# Altium PCB CarteMere.PcbDoc
Units mm, origin at the board's own origin, x right, y up, seen from the top; angles counter-clockwise.
Board outline 100 x 100 mm, 2 copper layers (Top Layer, Bottom Layer), stack 1.534 mm thick; 20 components, 29 nets, 125 pads, 42 vias.
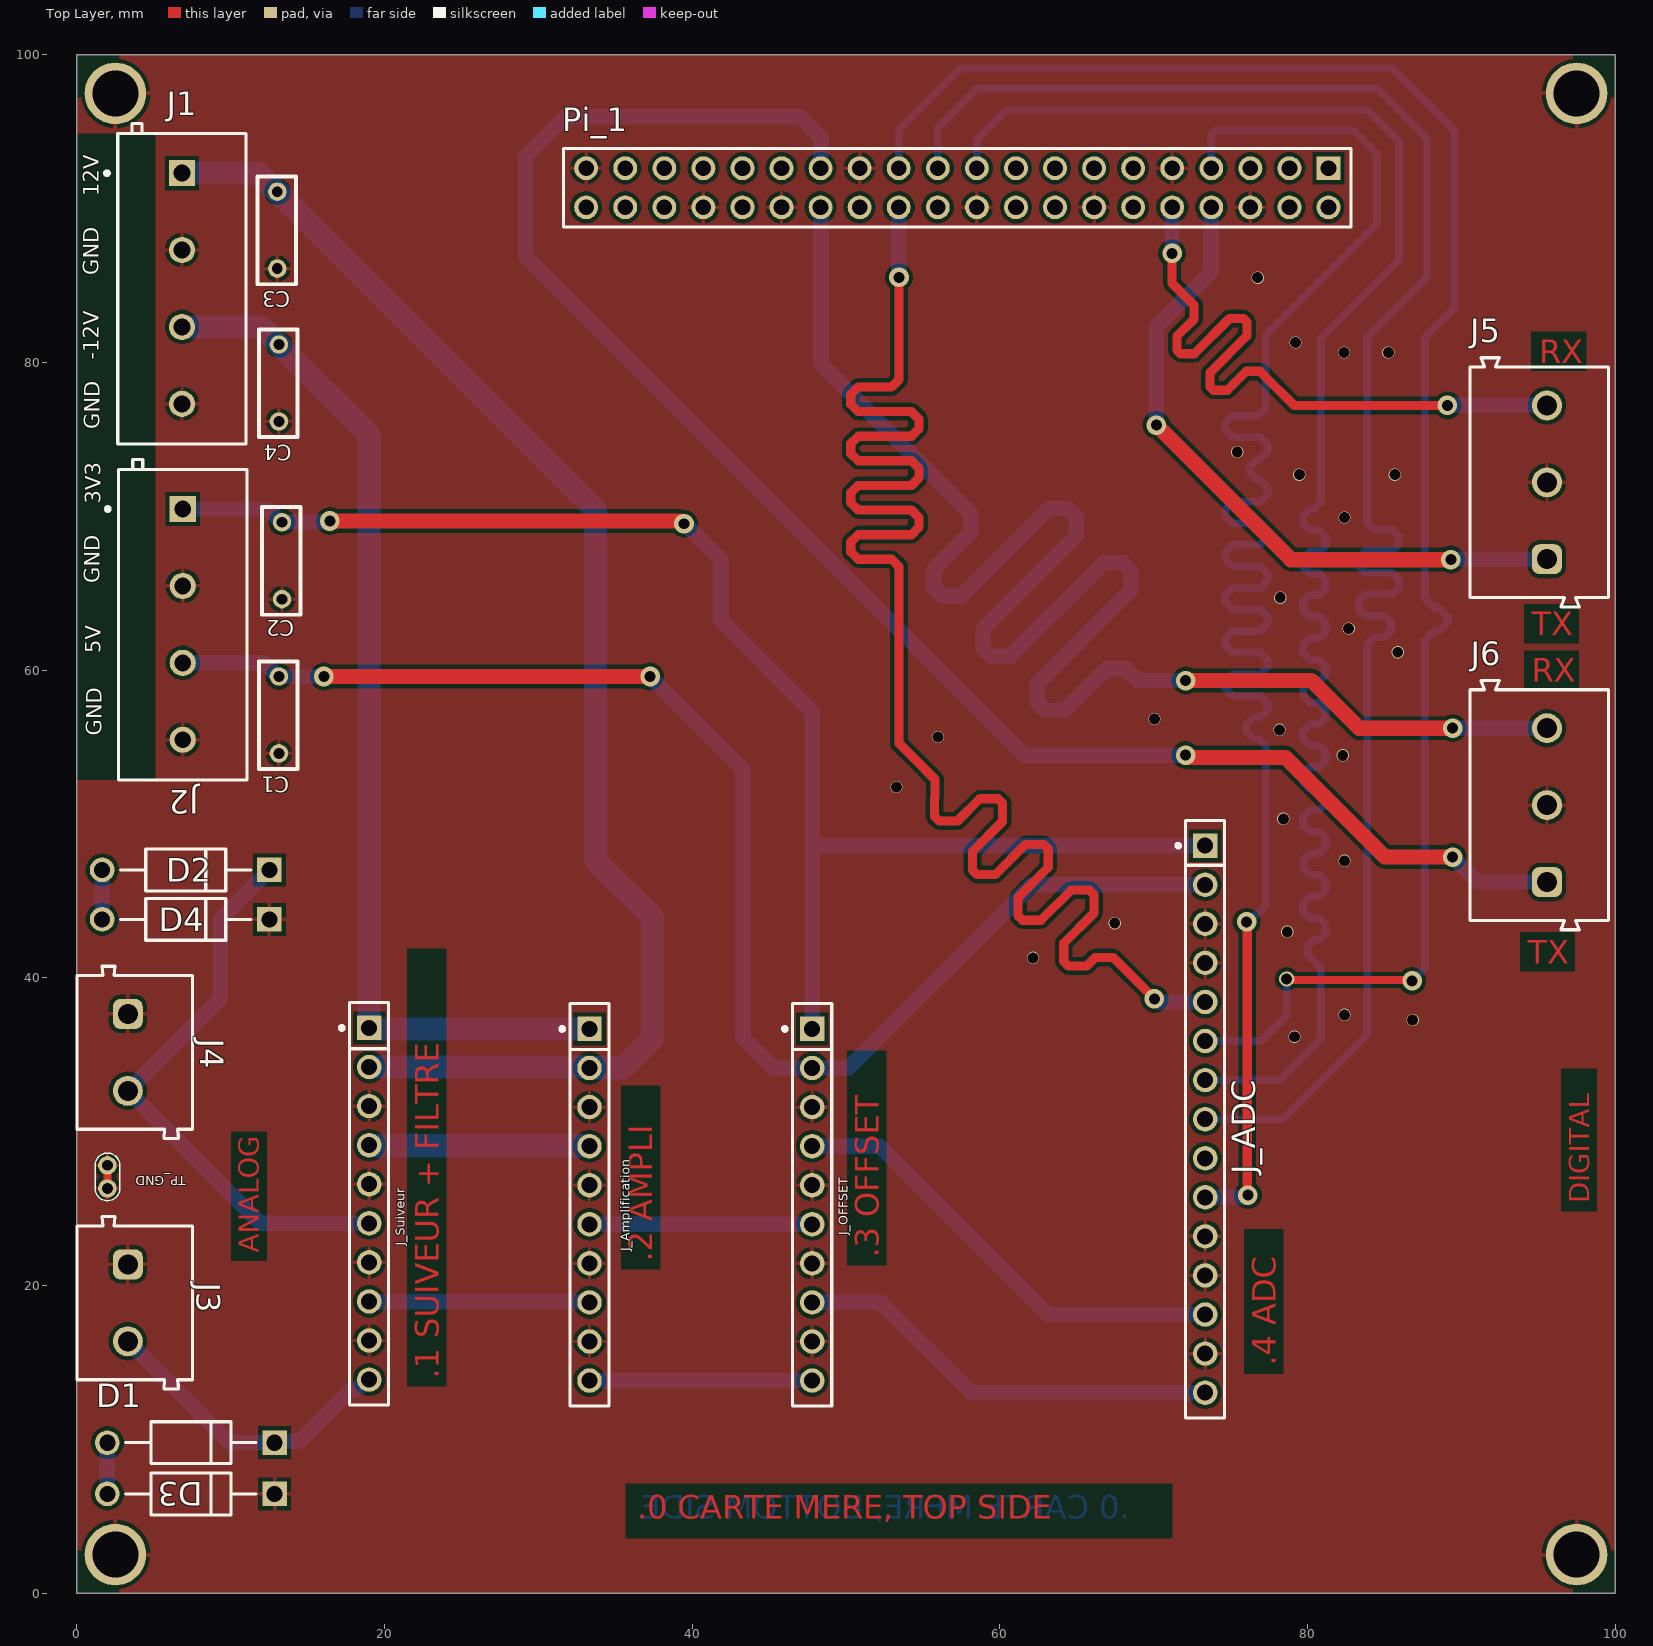
[diagram p0: Top Layer view]
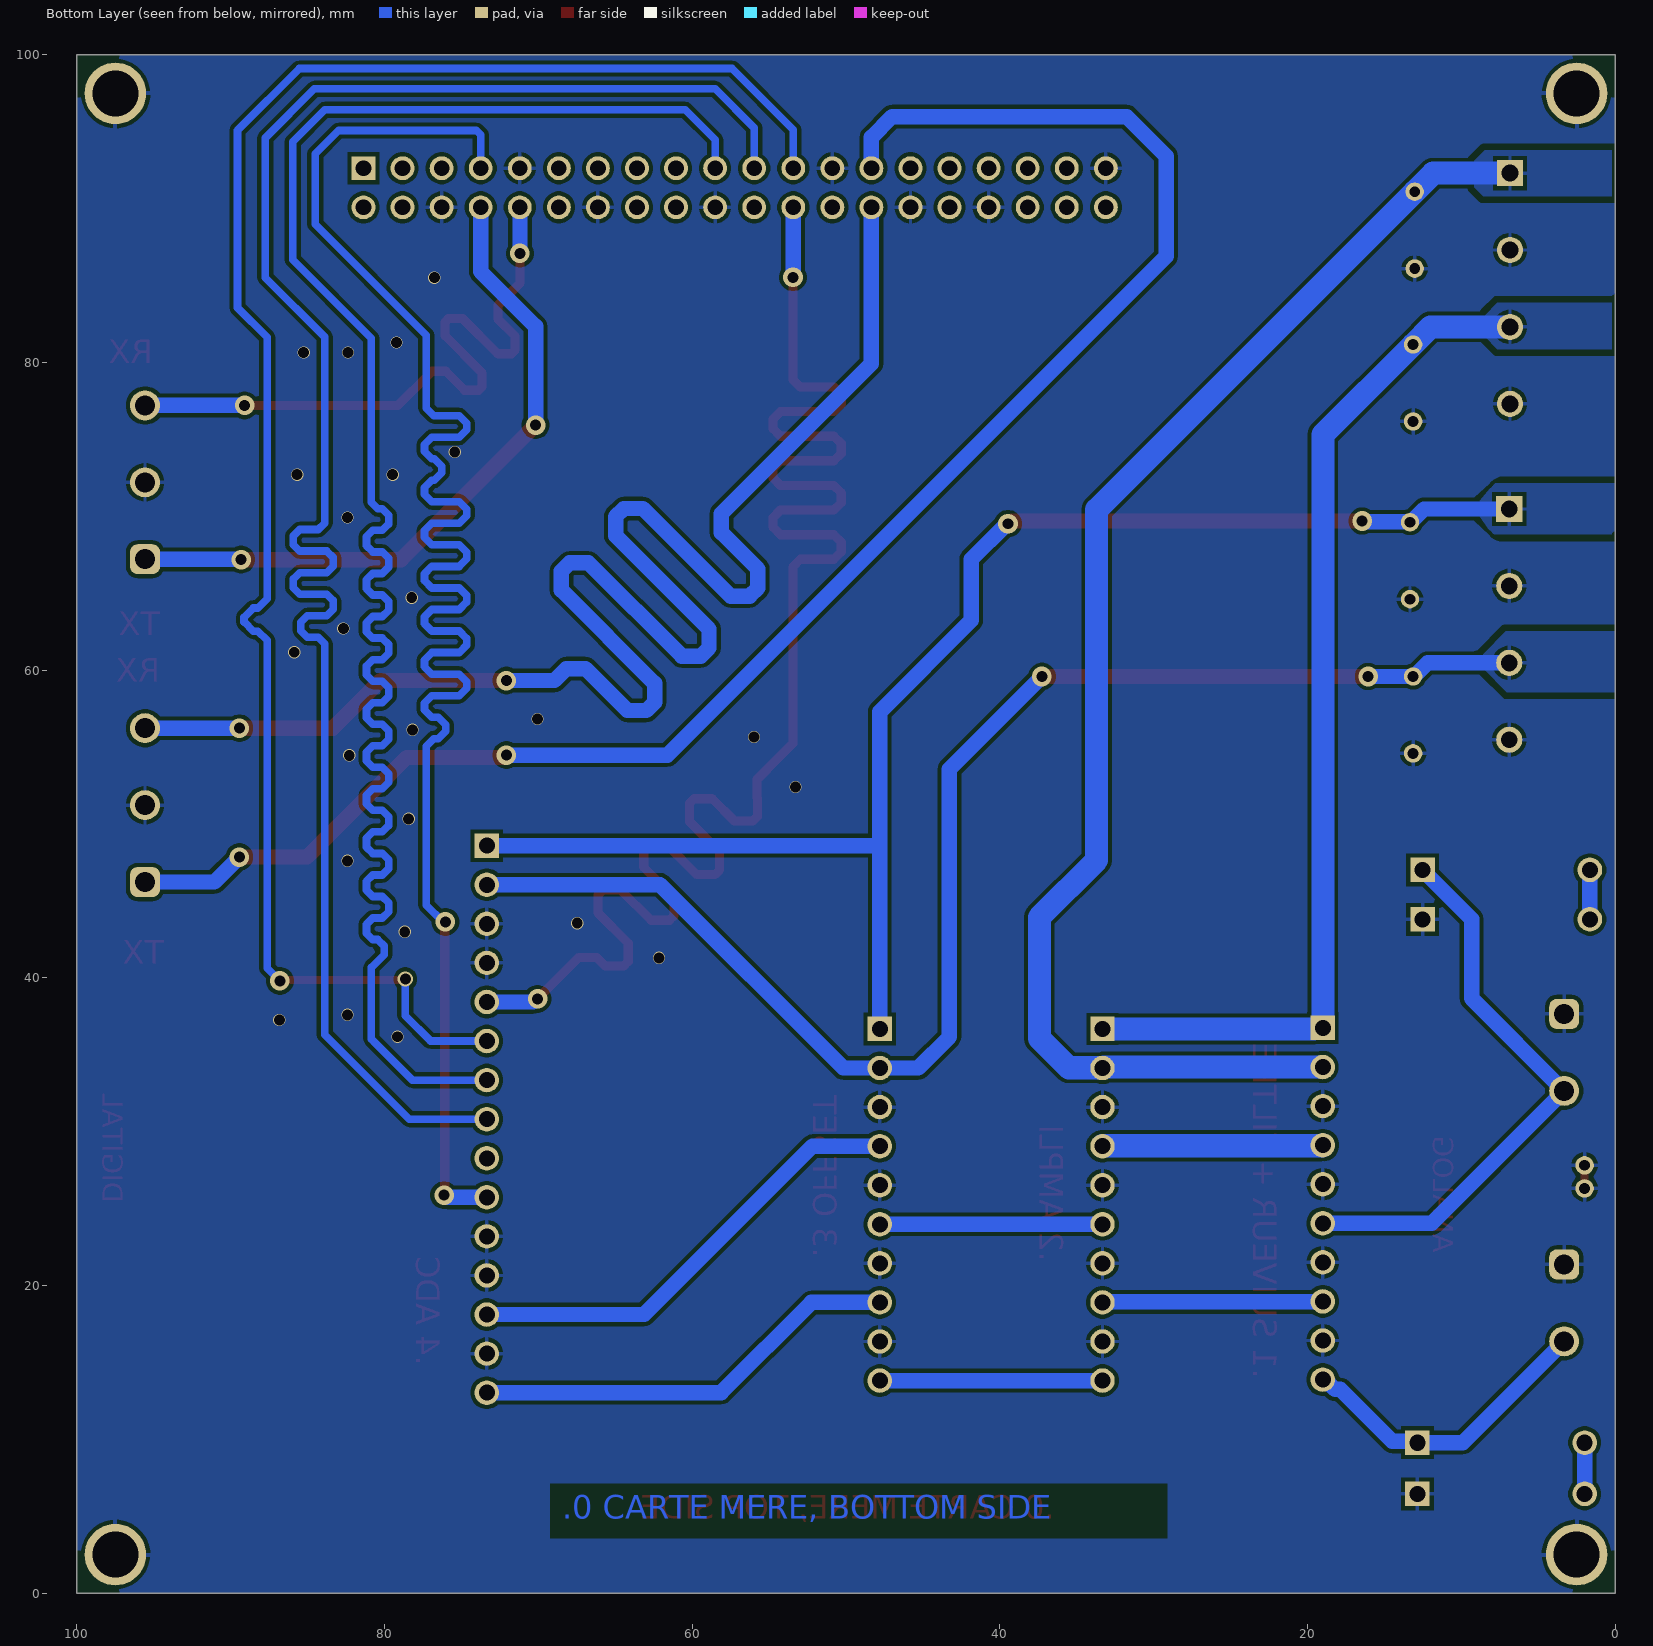
[diagram p1: Bottom Layer view, seen from below]
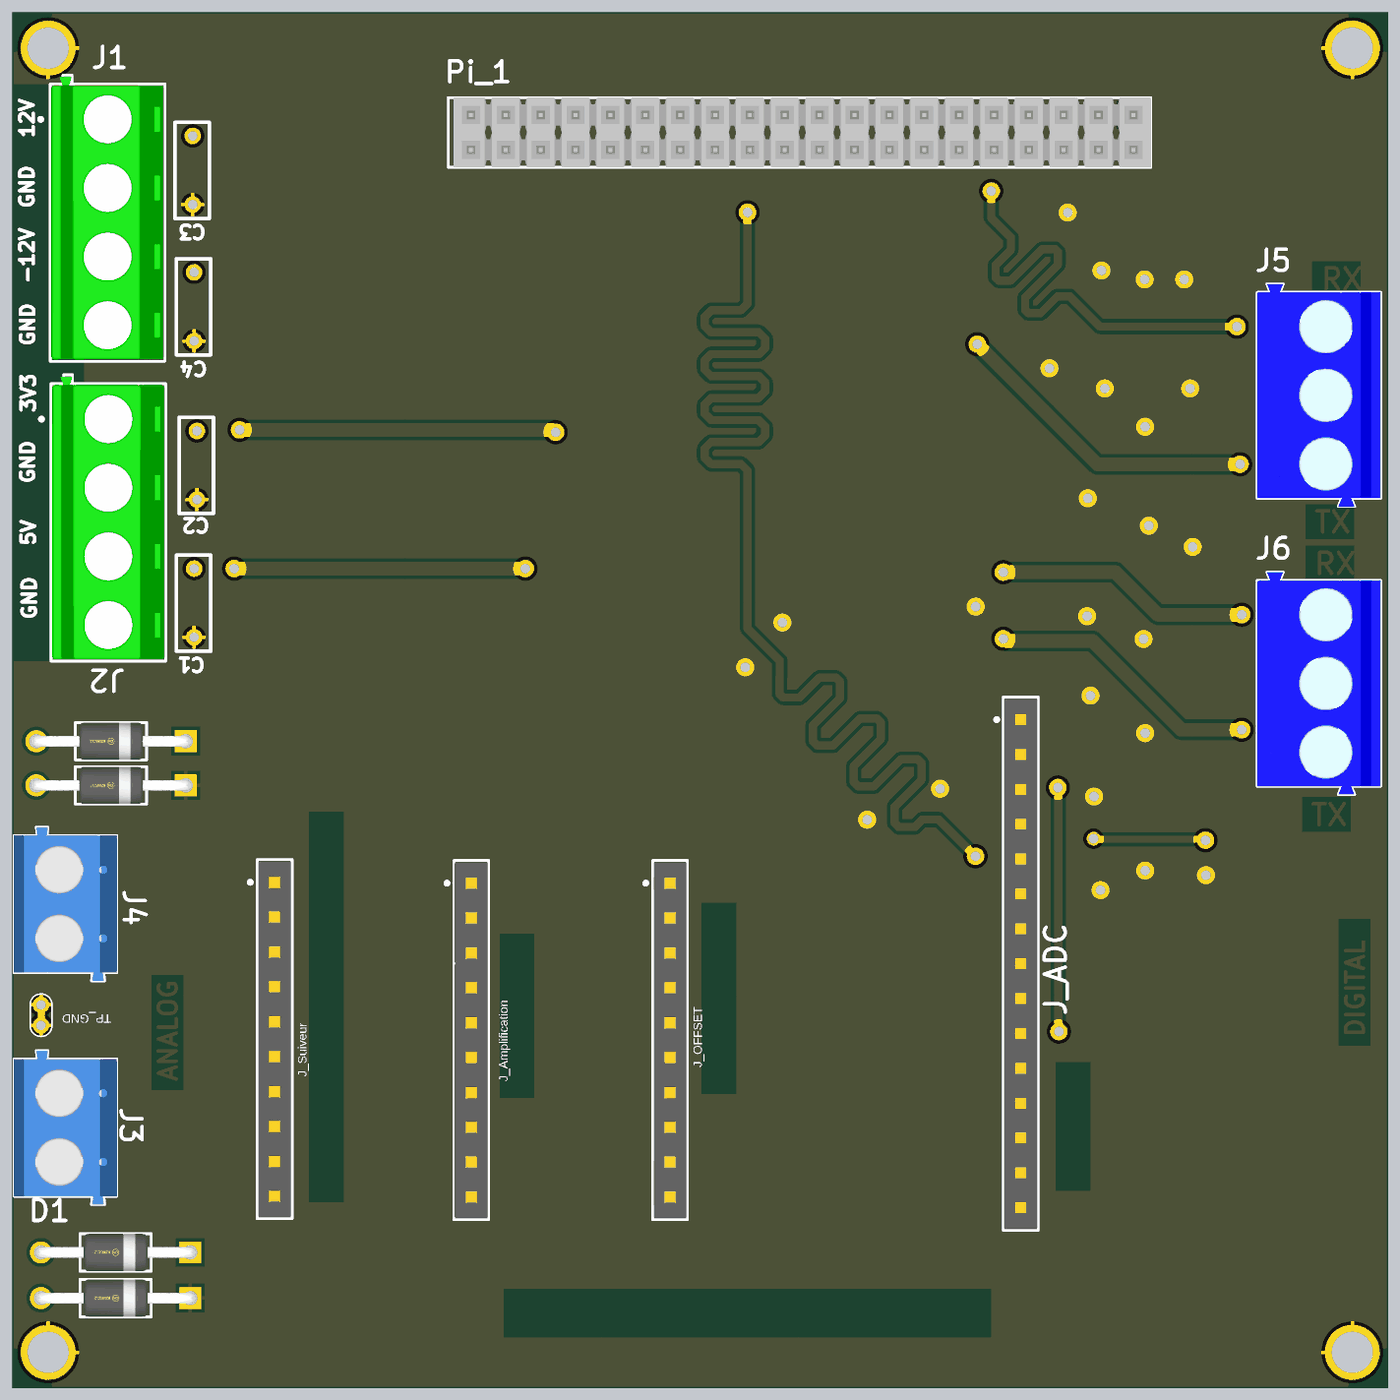
[diagram p2: 3D render of the assembled board from above, using the file's embedded part models]

## Layer stack, top to bottom
Top Solder: solder mask 0.0127, Solder Resist, Dk 3.3
Top Layer: signal copper 0.0178
Dielectric1: core 1.4986, FR-4, Dk 4.3
Bottom Layer: signal copper 0.0178
Bottom Solder: solder mask 0.0127, Solder Resist, Dk 3.3

## Board outline
0,0 0,100 100,100 100,0

## Design rules (kind name [scope] priority, off if disabled: settings)
Clearance [All] p1: gap=0.254 ignorepadtopadclearanceinfootprint=FALSE
DiffPairsRouting [All] p1: maxlimit=0.254 minlimit=0.254 mostfreqgap=0.254 toplayer_minwidth=0.254 toplayer_maxwidth=0.254 toplayer_prefwidth=0.254 bottomlayer_minwidth=0.254 bottomlayer_maxwidth=0.254 bottomlayer_prefwidth=0.254 maxuncoupledlength=12.7
HoleSize [All] p1: absolutevalues=TRUE maxlimit=7.62 minlimit=0.15 maxpercent=80.000 minpercent=20.000
MinimumAnnularRing [All] p1: minimumring=0.1
PasteMaskExpansion [All] p1: expansion=0.254
PlaneClearance [All] p1: clearance=0.381
PlaneConnect [All] p1: pad.planeconnectstyle=Relief pad.reliefexpansion=0.508 pad.reliefentries=4 pad.reliefconductorwidth=0.254 pad.reliefairgap=0.254 via.planeconnectstyle=Direct via.reliefexpansion=0.508 via.reliefentries=4 via.reliefconductorwidth=0.254 via.reliefairgap=0.254
PolygonConnect [All] p1: thpad.connectstyle=Relief thpad.reliefconductorwidth=0.254 thpad.reliefentries=4 thpad.polygonreliefangle="90 Angle" thpad.airgapwidth=0.254 smdpad.connectstyle=Relief smdpad.reliefconductorwidth=0.254 smdpad.reliefentries=4 smdpad.polygonreliefangle="90 Angle" smdpad.airgapwidth=0.254 via.connectstyle=Direct via.reliefconductorwidth=0.254 via.reliefentries=4 via.polygonreliefangle="90 Angle" via.airgapwidth=0.254
RoutingVias [All] p1: holewidth=0.254 width=0.254 viastyle="Through Hole" minholewidth=0.254 minwidth=0.254 maxholewidth=1 maxwidth=1.5
SMDNeckDown [All] p1: percent=100.000
SilkToSilkClearance [All] p1 off: silktosilkclearance=0.254
SilkToSolderMaskClearance SilkscreenOverComponentPads [IsPad] p1: minsilkscreentomaskgap=0.254 clearancetoexposedcopper=TRUE
SolderMaskExpansion [All] p1: expansion=0.254 istentingtop=FALSE
SupplyNets "Schematic Supply Nets_3" [InNet('-12V')] p1: voltage=0.000
SupplyNets "Schematic Supply Nets_2" [InNet('12V')] p2: voltage=0.000
SupplyNets "Schematic Supply Nets_4" [InNet('GND')] p3: voltage=0.000
SupplyNets "Schematic Supply Nets_1" [InNet('5V')] p4: voltage=0.000
SupplyNets "Schematic Supply Nets" [InNet('3V3')] p5: voltage=0.000
Width [All] p1: maxlimit=2 minlimit=0.254 preferedwidth=0.254 minimp=50.000000 maximp=50.000000 favimp=50.000000
23 further rules are at their usual default settings.

## Classes and differential pairs
component class Sheet1: C1 C2 C3 C4

## Components (designator, comment, footprint, x,y, rotation, side; value= is the part's Value field where it differs from the comment)
C1 "Cap_6.0*2.5*6mm" Cap_6.0%2A2.5%2A6mm 13.132,54.59 r90 top value=100nF
C2 "Cap_6.0*2.5*6mm" Cap_6.0%2A2.5%2A6mm 13.335,64.618 r90 top value=100nF
C3 "Cap_6.0*2.5*6mm" Cap_6.0%2A2.5%2A6mm 13.03,86.106 r90 top value=100nF
C4 "Cap_6.0*2.5*6mm" Cap_6.0%2A2.5%2A6mm 13.132,76.171 r90 top value=100nF
D1 "ZENER_Diode" Zener_Diode 7.417,9.779 r180 top value=2V
D2 "ZENER_Diode" Zener_Diode 7.078,47.016 r180 top value=2V
D3 "ZENER_Diode" Zener_Diode 7.417,6.452 r180 top value=2V
D4 "ZENER_Diode" Zener_Diode 7.078,43.801 r180 top value=2V
J1 "282836-4" FP-282836-4-MFG 6.833,85.115 r270 top
J2 "282836-4" FP-282836-4-MFG 6.884,63.277 r270 top
J3 "691102710002" 691102710002 3.759,18.872 r270 top
J4 "691102710002" 691102710002 3.759,35.154 r270 top
J5 "691101710003" 691101710003 95.071,72.212 r90 top
J6 "691101710003" 691101710003 95.071,51.227 r90 top
J_ADC "SSW-115-01-T-S" FP-SSW-115-01-T-S-MFG 73.348,30.81 r270 top
J_Amplification "SSW-110-01-G-S" FP-SSW-110-01-G-S-MFG 33.325,25.248 r270 top
J_OFFSET "SSW-110-01-G-S" FP-SSW-110-01-G-S-MFG 47.803,25.248 r270 top
J_Suiveur "SSW-110-01-G-S" FP-SSW-110-01-G-S-MFG 18.999,25.311 r270 top
Pi_1 "GPIO_conn_RaspberyPi" Pi_20x2_pins_Male 82.939,94.073 r180 top
TP_GND "Test_Point" Test_Point_Hook 1.983,27.808 r180 top

## Footprints (in the part's own frame and the unit in brackets; to place one, negate y for a bottom-side part, rotate by r counter-clockwise, add the part's x,y. Pads: shape width x height; smd on the part's side, far side on the other; paste and mask are expansions set on the pad)
691101710003 [mm] "5,00mm - modular - blue - Horizontal entry with pressure clamp - 12,6mm height - 03p"
  rrect50% 1.95x1.95 hole 1.3: 1(-5,-0.5)
  round 1.95 hole 1.3: 2(0,-0.5) 3(5,-0.5)
  silkscreen extent -8.1,-4.5 8.1,4.5, body extent -8.1,-4.5 8.1,4.5, height 12.65
691102710002 [mm] "5,00mm - modular - blue - Horizontal entry with pressure clamp - 9,9 mm height - 02p"
  rrect50% 1.95x1.95 hole 1.3: 1(-2.5,-0.45)
  round 1.95 hole 1.3: 2(2.5,-0.45)
  silkscreen extent -5.6,-3.75 5.6,3.75, body extent -5.6,-3.75 5.6,3.75, height 9.96
Cap_6.0%2A2.5%2A6mm [mm]
  round 1.2 hole 0.7: 1(0,0) 2(5,0)
  silkscreen extent -1.02,-1.21 5.98,1.29, body extent -1.02,-1.21 5.98,1.29, height 6
FP-282836-4-MFG [mm]
  rect 1.7x1.7 hole 1.1 paste-2539.97 mask+0: 1(-7.2,0)
  round 1.7 hole 1.1 paste-2539.97 mask+0: 2(-2.2,0) 3(2.8,0) 4(7.8,0)
  silkscreen extent -10.43,-5 10.43,4.18, body extent -10.52,-4.28 10.53,4.28, height 0.25
FP-SSW-110-01-G-S-MFG [mm]
  rect 1.59x1.59 hole 1.04 paste-2539.97 mask+0: 1(-11.43,0)
  round 1.59 hole 1.04 paste-2539.97 mask+0: 2(-8.89,0) 3(-6.35,0) 4(-3.81,0) 5(-1.27,0) 6(1.27,0) 7(3.81,0) 8(6.35,0) 9(8.89,0) 10(11.43,0)
  silkscreen extent -13.08,-1.9 13.08,1.27, body extent -13.18,-1.37 13.18,1.37, height 0.25
FP-SSW-115-01-T-S-MFG [mm]
  rect 1.59x1.59 hole 1.04 paste-2539.97 mask+0: 1(-17.78,0)
  round 1.59 hole 1.04 paste-2539.97 mask+0: 2(-15.24,0) 3(-12.7,0) 4(-10.16,0) 5(-7.62,0) 6(-5.08,0) 7(-2.54,0) 8(0,0) 9(2.54,0) 10(5.08,0) 11(7.62,0) 12(10.16,0) 13(12.7,0) 14(15.24,0) 15(17.78,0)
  silkscreen extent -19.43,-1.87 19.43,1.27, body extent -19.53,-1.37 19.53,1.37, height 0.25
Pi_20x2_pins_Male [mm] ".025 SQ Post Terminal Strip Assembly, 2x20 Pins, Vertical, 2.54mm Pitch, Male"
  rect 1.55x1.55 hole 1.02: 1(1.571,1.442)
  round 1.55 hole 1.02: 2(1.571,3.982) 3(4.111,1.442) 4(4.111,3.982) 5(6.651,1.442) 6(6.651,3.982) 7(9.191,1.442) 8(9.191,3.982) 9(11.731,1.442) 10(11.731,3.982) 11(14.271,1.442) 12(14.271,3.982) 13(16.811,1.442) 14(16.811,3.982) 15(19.351,1.442) 16(19.351,3.982) 17(21.891,1.442) 18(21.891,3.982) 19(24.431,1.442) 20(24.431,3.982) 21(26.971,1.442) 22(26.971,3.982) 23(29.511,1.442) 24(29.511,3.982) 25(32.051,1.442) 26(32.051,3.982) 27(34.591,1.442) 28(34.591,3.982) 29(37.131,1.442) 30(37.131,3.982) 31(39.671,1.442) 32(39.671,3.982) 33(42.211,1.442) 34(42.211,3.982) 35(44.751,1.442) 36(44.751,3.982) 37(47.291,1.442) 38(47.291,3.982) 39(49.831,1.442) 40(49.831,3.982)
  silkscreen extent 0.11,0.17 51.29,5.25, body extent 0.11,0.17 50.91,5.25, height 9.27
Test_Point_Hook [mm]
  round 1.2 hole 0.7: TP?(0,1.5) TP?(0,0)
  Top Layer lines w0.5: -0.004,1.004 -0.004,0.555
  silkscreen extent -0.8,-0.8 0.8,2.3
Zener_Diode [mm]
  rect 1.6x1.6 hole 1.05 paste-2539.97 mask+0: 1(-5.438,0)
  round 1.6 hole 1.05 paste-2539.97 mask+0: 2(5.438,0)
  silkscreen extent -4.24,-1.36 4.24,1.36, body extent -6.34,-1.46 6.34,1.46, height 0.25

## Part data
J1 J2: library part CMP-03790-46505329-1, "282836-4 Connector, Terminal Block; Wire Receptacle; 4 Pos.; 16-30 AWG; 0.197 in. CL; Sid", Color=Green, Current=13.5A, Flammability Rating="UL94 V-0", Manufacturer Lifecycle Status=ACTIVE, Max Supply Voltage (AC)=300V, Voltage Rating (AC)=250V, Approvals=UL, Connector System=Wire-to-Board, Connector Type=Receptacle, Contact Material=Brass, Contact Plating=Tin, Current Rating=13.5A, Depth=8.2mm, ELV=Compliant, Housing Color=Green, Housing Material=Polyamide, Lead Free="Lead Free", Lead Pitch=5mm, Length=20mm, Lifecycle Status=Production, Max Current Rating=13.5A, Max Voltage Rating (AC)=300V, Mount="Through Hole", NexarPartId=46505329, Number of Circuits=4, Number of Contacts=4, Number of Levels=1, Number of Poles=4, Number of Positions=4, Number of Positions Per Level=4, Number of Rows=1, Operating Supply Voltage=300V, Orientation=Straight, Packaging=Bulk, Pitch=5mm, Plating=Brass, Radiation Hardening=No, REACH SVHC=Unknown, RoHS=Compliant, Tail Length=3.5mm, Termination="Screw, Solder", Thread Size=M3, Voltage=300V, Voltage Rating=300V, Voltage Rating (DC)=250V, Width=10mm, Wire Gauge (Max)=30AWG, Wire Gauge (Min)=30AWG
J3 J4: library part CMP-1502-03258-2, Color=Blue, Current=15A, Max Operating Temperature=105°C, Min Operating Temperature=-40°C, Voltage=300V, Contact Material=Brass, Contact Plating=Tin, Current Rating=15A, Height=13.4mm, Housing Material=Nylon, Lead Pitch=5mm, Length=7.5mm, Mount="Through Hole", NexarPartId=8917706, Number of Contacts=2, Number of Levels=1, Number of Pins=2, Number of Positions Per Level=2, Packaging=Box, Pitch=5.0038mm, Plating=Steel, REACH SVHC=Unknown, RoHS=Compliant, Stripping Length=-6mm, Termination=Screw, Voltage Rating=300V, Width=11.2mm, Wire Gauge (Max)=22AWG, Wire Gauge (Min)=14AWG, Wire/Cable Gauge=22AWG
J5 J6: library part CMP-1502-03257-2, Color=Blue, Current=16A, Max Operating Temperature=105°C, Min Operating Temperature=-40°C, Voltage=250V, Contact Material=Brass, Contact Plating=Tin, Current Rating=16A, Height=16.4mm, Housing Material=Nylon, Lead Pitch=5mm, Length=9mm, Mount="Through Hole", NexarPartId=8917705, Number of Contacts=3, Number of Levels=1, Number of Pins=3, Number of Positions Per Level=3, Packaging=Box, Pitch=5.0038mm, Plating=Steel, REACH SVHC=Unknown, RoHS=Compliant, Stripping Length=-7mm, Termination=Screw, Voltage Rating=250V, Width=16.2mm, Wire Gauge (Max)=26AWG, Wire Gauge (Min)=14AWG, Wire/Cable Gauge=26AWG
J_ADC: library part CMP-02766-001723-1, "CONN RCPT 15POS 0.1 TIN PCB", Color=Black, Contact Resistance=10mR, Max Current Rating=6.9A, Max Operating Temperature=105°C, Max Voltage Rating (AC)=550V, Min Operating Temperature=-55°C, Connector Type=Receptacle, Contact Material=Bronze, Contact Plating=Tin, Contact Type="Female Socket", Depth=2.41mm, Gender=Receptacle, Housing Color=Black, Housing Material=Polymer, Lead Free="Lead Free", Length=38.61mm, Mating Cycles=100, Mount="Through Hole", Number of Contacts=15, Number of Positions=15, Number of Rows=1, Orientation=Straight, Packaging=Bulk, Pitch=0.1inch, Radiation Hardening=No, REACH SVHC="No SVHC", RoHS Compliant=Yes, Series=SSW, System=Connector, Termination=Solder, Width=2.41mm
J_Amplification J_OFFSET J_Suiveur: library part CMP-1272-00002-2, Color=Black, Contact Resistance=10mΩ, Current Rating=6.9A, Manufacturer Lifecycle Status=PRODUCTION, Max Operating Temperature=125°C, Max Voltage Rating (AC)=550V, Min Operating Temperature=-55°C, Voltage Rating (AC)=465V, Voltage Rating (DC)=655V, Connector Type=Socket, Contact Material=Bronze, Contact Plating=Gold, Depth=2.41mm, Gender=Receptacle, Housing Color=Black, Lead Free="Lead Free", Lead Length=2.64mm, Lead Pitch=2.54mm, Length=25.91mm, Lifecycle Status=Production, Max Current Rating=6.9A, NexarPartId=296065, Number of Contacts=10, Number of Positions=10, Number of Rows=1, Orientation=Vertical, Packaging=Bulk, Pitch=2.54mm, Radiation Hardening=No, REACH SVHC="No SVHC", RoHS=Compliant, System=Connector, Termination=Solder, Voltage Rating=550V
Pi_1: System=Connector

## Free pads (board coordinates)
  round 4 hole 3 paste-2539.97: 1(2.5,2.5) 1(2.5,97.5) 1(97.5,2.5) 1(97.5,97.5)

## Via types
v1: diameter 0.8, hole 0.711, Top Layer to Bottom Layer, 24 vias
v2: diameter 1.27, hole 0.711, Top Layer to Bottom Layer, 17 vias
v3: diameter 1, hole 0.711, Top Layer to Bottom Layer, 1 vias

## Nets (pads, with @x,y where several pads share a name; then routed paths per layer and width w, separated by ;. In a path a pad name is that pad's centre, name@x,y a point inside that pad or via, vN(x,y) a via of type N, cw(c..) or ccw(c..) an arc to the next point about the centre after c; other vN are vias at no path point)
3V3: C1.2 J2.3 J_ADC.2 J_OFFSET.2 | length 92.6
  Top Layer w1: J2.3 J2.3@6.932,60.477 ; v2(16.053,59.59) v2(37.261,59.59)
  Bottom Layer w1: J2.3 12.191,60.477 13.078,59.59 v2(16.053,59.59) ; v2(37.261,59.59) 43.282,53.57 43.282,36.159 45.303,34.138 J_OFFSET.2 50.176,34.138 62.089,46.05 J_ADC.2
5V: C2.2 J2.1 J_ADC.1 J_OFFSET.1 | length 95
  Top Layer w1: v2(16.447,69.697) 39.218,69.697 39.396,69.52 v2(39.469,69.52)
  Bottom Layer w1: J2.1 12.421,70.477 13.281,69.618 C2.2 13.373,69.656 16.405,69.656 v2(16.447,69.697) ; v2(39.469,69.52) 39.542,69.52 41.859,67.202 41.859,63.24 47.803,57.297 47.803,48.499 ; J_OFFSET.1 47.803,48.499 ; J_ADC.1 47.894,48.59 47.803,48.499
12V: C3.2 J1.1 J_Amplification.2 J_Suiveur.2 | length 91.1
  Bottom Layer w1.5: J1.1 11.821,92.315 C3.2 33.706,70.43 33.706,47.649 37.427,43.928 37.427,36.07 35.511,34.155 33.342,34.155 J_Amplification.2 ; J_Suiveur.2 33.237,34.201 33.283,34.155 J_Amplification.2@33.295,34.167
-12V: C4.2 J1.3 J_Amplification.1 J_Suiveur.1 | length 67.9
  Bottom Layer w1.5: J1.3 11.988,82.315 C4.2 18.999,75.305 J_Suiveur.1@18.999,36.786 ; J_Suiveur.1@19.044,36.696 19.574,36.696 19.592,36.678 J_Amplification.1
ADC_CK: J_ADC.6 Pi_1.23 | length 116.5
  Top Layer w0.5: v3(78.647,39.921) 78.706,39.863 86.746,39.863 v2(86.804,39.804)
  Bottom Layer w0.5: Pi_1.23 53.428,95.132 57.407,99.111 85.538,99.111 89.56,95.089 89.56,83.563 87.633,81.635 87.633,67.887 87.633,64.637 88.233,64.037 88.532,64.037 89.132,63.437 89.132,63.137 88.532,62.537 88.233,62.537 87.633,61.937 87.633,60.259 87.633,40.633 v2(86.804,39.804) ; J_ADC.6 77.009,35.89 78.647,37.529 v3(78.647,39.921)
ADC_CS: J_ADC.5 Pi_1.24 | length 112.4
  Top Layer w0.6: v2(53.446,85.54) 53.446,83.638 53.446,78.891 52.966,78.411 50.792,78.411 50.312,77.931 50.312,77.291 50.792,76.811 54.26,76.811 54.74,76.331 54.74,75.691 54.26,75.211 50.792,75.211 50.312,74.731 50.312,74.091 50.792,73.611 54.26,73.611 54.74,73.131 54.74,72.491 54.26,72.011 50.792,72.011 50.312,71.531 50.312,70.891 50.792,70.411 54.26,70.411 54.74,69.931 54.74,69.291 54.26,68.811 50.792,68.811 50.312,68.331 50.312,67.691 50.792,67.211 52.966,67.211 53.446,66.731 53.446,66.431 53.446,55.241 54.481,54.206 55.79,52.896 55.79,51.708 55.761,51.68 55.761,50.492 56.058,50.195 57.246,50.195 58.694,51.643 59.882,51.643 60.179,51.346 60.179,50.158 58.216,48.194 58.216,47.007 58.513,46.71 59.701,46.71 61.664,48.673 62.852,48.673 63.149,48.376 63.149,47.188 61.186,45.225 61.186,44.037 61.483,43.74 62.671,43.74 64.634,45.703 65.822,45.703 66.119,45.406 66.119,44.218 64.156,42.255 64.156,41.067 64.453,40.77 65.641,40.77 66.185,41.314 67.373,41.314 67.585,41.102 v2(70.053,38.633)
  Bottom Layer w1: Pi_1.24 53.437,90.082 53.437,85.549 v2(53.446,85.54) ; v2(70.053,38.633) 70.126,38.633 70.329,38.43 J_ADC.5
ADC_DI: J_ADC.7 Pi_1.19 | length 120
  Bottom Layer w0.5: Pi_1.19 58.508,94.491 60.449,96.432 83.888,96.432 85.97,94.35 85.97,86.681 80.857,81.569 80.857,72.557 80.857,70.907 80.437,70.487 80.141,70.487 79.721,70.067 79.721,69.507 80.141,69.087 80.757,69.087 81.177,68.667 81.177,68.107 80.757,67.687 80.141,67.687 79.721,67.267 79.721,66.707 80.141,66.287 80.757,66.287 81.177,65.867 81.177,65.307 80.757,64.887 80.141,64.887 79.721,64.467 79.721,63.907 80.141,63.487 80.757,63.487 81.177,63.067 81.177,62.507 80.757,62.087 80.141,62.087 79.721,61.667 79.721,61.107 80.141,60.687 80.757,60.687 81.177,60.267 81.177,59.707 80.757,59.287 80.141,59.287 79.721,58.867 79.721,58.307 80.141,57.887 80.757,57.887 81.177,57.467 81.177,56.907 80.757,56.487 80.141,56.487 79.721,56.067 79.721,55.507 80.141,55.087 80.757,55.087 81.177,54.667 81.177,54.107 80.757,53.687 80.141,53.687 79.721,53.267 79.721,52.707 80.141,52.287 80.757,52.287 81.177,51.867 81.177,51.307 80.757,50.887 80.141,50.887 79.721,50.467 79.721,49.907 80.141,49.487 80.757,49.487 81.177,49.067 81.177,48.507 80.757,48.087 80.141,48.087 79.721,47.667 79.721,47.107 80.141,46.687 80.757,46.687 81.177,46.267 81.177,45.707 80.757,45.287 80.154,45.287 79.734,44.867 79.734,44.307 80.154,43.887 80.757,43.887 81.177,43.467 81.177,42.907 80.757,42.487 80.437,42.487 80.017,42.067 80.017,41.507 80.437,41.087 80.857,40.667 80.857,36.026 80.618,35.787 78.181,33.35 J_ADC.7
ADC_DO: J_ADC.8 Pi_1.21 | length 120
  Bottom Layer w0.5: Pi_1.21 55.968,95.246 58.511,97.79 84.557,97.79 87.748,94.599 87.748,85.519 83.89,81.661 83.89,69.814 83.89,69.564 84.31,69.144 85.517,69.144 85.937,68.724 85.937,68.164 85.517,67.744 83.763,67.744 83.343,67.324 83.343,66.764 83.763,66.344 85.517,66.344 85.937,65.924 85.937,65.364 85.517,64.944 83.763,64.944 83.343,64.524 83.343,63.964 83.763,63.544 85.019,63.544 85.439,63.124 85.439,62.564 85.019,62.144 84.31,62.144 83.89,61.724 83.89,46.487 83.89,36.306 78.394,30.81 J_ADC.8
ADC_IRQ/MDAT: J_ADC.9
ADC_MCLK: J_ADC.10 Pi_1.7 | length 116.6
  Top Layer w0.6: v2@76.088,25.909 v2@76.088,43.597
  Top Layer w1: v2(76.047,43.637) v2@76.088,43.597 ; v2@76.088,25.909 v2(76.128,25.868)
  Bottom Layer w0.5: Pi_1.7 73.748,94.796 74.04,95.089 82.981,95.089 84.506,93.564 84.506,88.988 77.279,81.762 77.279,78.685 77.279,77.035 76.789,76.545 75.136,76.545 74.646,76.055 74.646,75.635 75.136,75.145 76.918,75.145 77.408,74.655 77.408,74.235 76.918,73.745 76.769,73.745 76.279,73.255 76.279,72.835 76.769,72.345 76.918,72.345 77.408,71.855 77.408,71.435 76.918,70.945 75.136,70.945 74.646,70.455 74.646,70.035 75.136,69.545 76.918,69.545 77.408,69.055 77.408,68.635 76.918,68.145 75.136,68.145 74.646,67.655 74.646,67.235 75.136,66.745 76.918,66.745 77.408,66.255 77.408,65.835 76.918,65.345 75.136,65.345 74.646,64.855 74.646,64.435 75.136,63.945 76.918,63.945 77.408,63.455 77.408,63.035 76.918,62.545 75.136,62.545 74.646,62.055 74.646,61.635 75.136,61.145 76.918,61.145 77.408,60.655 77.408,60.235 76.918,59.745 75.136,59.745 74.646,59.255 74.646,58.835 75.136,58.345 76.918,58.345 77.408,57.855 77.408,57.435 76.918,56.945 76.512,56.945 76.022,56.455 76.022,56.035 76.512,55.545 76.789,55.545 77.279,55.055 77.279,46.407 77.279,44.717 76.199,43.637 v2(76.047,43.637)
  Bottom Layer w1: J_ADC.10 75.917,25.73 76.055,25.868 v2(76.128,25.868)
GND: C1.1 C2.1 C3.1 C4.1 D3.1 D4.1 J1.2 J1.4 J2.2 J2.4 J3.1 J4.1 J5.2 J6.2 J_ADC.3 J_ADC.4 J_ADC.11 J_ADC.12 J_ADC.14 J_Amplification.3 J_Amplification.5 J_Amplification.7 J_Amplification.9 J_OFFSET.3 J_OFFSET.5 J_OFFSET.7 J_OFFSET.9 J_Suiveur.3 J_Suiveur.5 J_Suiveur.7 J_Suiveur.9 pad.1 Pi_1.6 Pi_1.9 Pi_1.14 Pi_1.20 Pi_1.25 Pi_1.30 Pi_1.34 Pi_1.39 TP_GND.TP?
  other v1: 79.156,36.169 86.837,37.257 82.409,37.593 62.161,41.299 78.686,42.986 67.47,43.554 82.409,47.606 78.429,50.338 53.279,52.403 82.294,54.46 55.985,55.66 78.181,56.124 70.06,56.82 85.87,61.167 82.677,62.713 78.232,64.712 82.406,69.921 79.47,72.712 85.683,72.712 75.436,74.18 82.372,80.651 85.256,80.651 79.225,81.305 76.765,85.519
NetD1_2: D1.2 D3.2 | length 3.3
  Bottom Layer w1: D1.2 D3.2 D3.2@1.983,6.448
NetD2_2: D2.2 D4.2 | length 3.2
  Bottom Layer w1: D4.2 D2.2
NetPi_1_35: Pi_1.35
NetPi_1_36: Pi_1.36
NetPi_1_38: Pi_1.38
NetPi_1_40: Pi_1.40
"RX0 & RX1": J5.3 Pi_1.10 | length 44.6
  Top Layer w0.6: v2(71.196,87.097) 71.196,85.154 71.411,84.939 72.625,83.726 72.625,82.821 71.512,81.708 71.512,80.803 71.739,80.577 72.644,80.577 74.931,82.865 75.836,82.865 76.063,82.638 76.063,81.733 73.663,79.334 73.663,78.429 73.889,78.202 74.794,78.202 76.019,79.427 76.924,79.427 77.136,79.214 79.138,77.212 v2(89.097,77.212)
  Bottom Layer w1: v2@71.196,87.17 Pi_1.10@71.196,90.08 ; v2(89.097,77.212) J5.3
RX2: J6.3 Pi_1.28 | length 112.5
  Top Layer w1: v2(72.078,59.327) 80.251,59.327 83.352,56.227 v2(89.441,56.227)
  Bottom Layer w1: Pi_1.28 48.348,79.93 54.647,73.63 55.001,73.277 58.099,70.178 58.099,68.941 55.736,66.578 55.736,65.341 56.266,64.81 57.504,64.81 63.203,70.51 64.441,70.51 64.971,69.98 64.971,68.742 58.908,62.679 58.908,61.442 59.438,60.911 60.676,60.911 66.739,66.974 67.976,66.974 68.507,66.444 68.507,65.207 62.444,59.144 62.444,57.906 62.974,57.376 64.211,57.376 66.938,60.102 68.175,60.102 68.529,59.749 68.95,59.327 v2(72.078,59.327) ; v2(89.441,56.227) J6.3
"TX0 & TX1": J5.1 Pi_1.8 | length 44.6
  Top Layer w1: v2(70.179,75.934) 78.923,67.189 v2(89.323,67.189)
  Bottom Layer w1: v2(70.179,75.934) 70.179,82.351 73.748,85.92 Pi_1.8 ; v2(89.323,67.189) 89.335,67.2 95.559,67.2 J5.1@95.561,67.202
TX2: J6.1 Pi_1.27 | length 112.5
  Top Layer w1: v2(72.078,54.478) 72.151,54.478 72.307,54.321 78.574,54.321 85.044,47.852 v2(89.441,47.852)
  Bottom Layer w1: Pi_1.27 48.348,94.643 47.004,95.987 31.75,95.987 29.185,93.421 29.185,86.898 61.605,54.478 v2(72.078,54.478) ; v2(89.441,47.852) 91.066,46.227 J6.1
V_OUT_AMPLI_1: J_Amplification.10 J_OFFSET.10 | length 14.5
  Bottom Layer w1: J_Amplification.10 J_OFFSET.10
V_OUT_AMPLI_2: J_Amplification.6 J_OFFSET.6 | length 14.5
  Bottom Layer w1: J_Amplification.6 J_OFFSET.6
V_OUT_OFFSET_1: J_ADC.15 J_OFFSET.8 | length 28
  Bottom Layer w1: J_OFFSET.8 52.248,18.898 58.115,13.03 J_ADC.15
V_OUT_OFFSET_2: J_ADC.13 J_OFFSET.4 | length 30.1
  Bottom Layer w1: J_OFFSET.4 52.18,29.058 63.128,18.11 J_ADC.13
V_Suiveur_1: J_Amplification.8 J_Suiveur.8 | length 14.4
  Bottom Layer w1: J_Suiveur.8 19.031,18.929 33.293,18.929 J_Amplification.8
V_Suiveur_2: J_Amplification.4 J_Suiveur.4 | length 14.3
  Bottom Layer w1.5: J_Suiveur.4 19.024,29.121 19.062,29.083 J_Amplification.4@33.325,29.083
Vin_1: D1.1 J3.2 J_Suiveur.10 | length 20.1
  Bottom Layer w1: J3.2 9.902,9.779 D1.1 12.945,9.869 14.486,9.869 17.859,13.241 18.2,13.241 18.84,13.881 J_Suiveur.10
Vin_2: D2.1 J4.2 J_Suiveur.6 | length 37.4
  Bottom Layer w1: D2.1 9.328,43.828 9.328,38.673 J4.2 11.922,24.041 J_Suiveur.6
pads on no net: Pi_1.1 Pi_1.2 Pi_1.3 Pi_1.4 Pi_1.5 Pi_1.11 Pi_1.12 Pi_1.13 Pi_1.15 Pi_1.16 Pi_1.17 Pi_1.18 Pi_1.22 Pi_1.26 Pi_1.29 Pi_1.31 Pi_1.32 Pi_1.33 Pi_1.37

## Polygon pours and split planes (outlines as drawn)
GND on Bottom Layer "GND" (solid, remove dead copper, pour order 7): 0,0 0,58.11 7.126,58.11 ccw(c7.126,58.338) 7.288,58.177 8.972,59.861 ccw(c8.81,60.022) 9.039,60.022 9.039,61.142 ccw(c8.81,61.142) 8.972,61.304 7.371,62.905 ccw(c7.209,62.744) 7.209,62.972 0,62.972 0,68.356 7.447,68.356 ccw(c7.315,69.439) 8.172,68.764 9.257,69.773 ccw(c9.019,69.875) 9.257,69.976 9.257,71.033 ccw(c9.102,71.097) 9.257,71.161 8.172,72.118 ccw(c7.217,71.45) 7.411,72.599 0,72.599 0,80.418 7.744,80.418 ccw(c7.744,80.647) 7.906,80.485 8.731,81.311 ccw(c8.57,81.472) 8.798,81.473 8.798,83.294 ccw(c8.571,83.294) 8.731,83.455 7.906,84.281 ccw(c7.745,84.12) 7.744,84.348 0.229,84.348 ccw(c0.228,84.119) 0,84.12 0,90.353 8.664,90.353 ccw(c8.664,90.582) 8.826,90.42 9.534,91.128 ccw(c9.373,91.29) 9.601,91.29 9.601,93.218 ccw(c9.373,93.218) 9.534,93.38 8.733,94.181 ccw(c8.572,94.02) 8.571,94.248 0,94.248 0,100 100,100 100,0
3V3 on Bottom Layer "3V3" (solid, remove dead copper, pour order 6): 0,58.567 7.032,58.567 8.582,60.117 8.582,61.048 7.114,62.515 0,62.515
5V on Bottom Layer "5V" (solid, remove dead copper, pour order 5): 0,69.037 0,72.142 7.852,72.142 8.81,71.015 8.81,70.011 7.994,68.822 0.228,68.822 ccw(c0,68.809)
-12V on Bottom Layer "12V" (solid, remove dead copper, pour order 4): 0.229,80.876 7.649,80.876 8.45,81.677 8.45,83.09 7.649,83.891 0.229,83.891
12V on Bottom Layer "12V" (solid, remove dead copper, pour order 3): 0.229,90.81 8.57,90.81 9.144,91.384 9.144,93.123 8.477,93.791 0.229,93.791
GND on Top Layer "GND" (solid, remove dead copper, pour order 8): 0,0 0,100 100,100 100,0

## Other copper
Top Layer:
  pour cut-out: 0,94.89 5.125,94.89 5.125,52.906 5.071,52.852 0,52.852
  text "RX" at 95.07,79.966 h1.52
  text "TX" at 94.59,62.255 h1.52
  text "RX" at 94.59,59.233 h1.52
  text "TX" at 94.336,40.929 h1.52
  text "DIGITAL" at 98.314,25.34 h1.3 r90
  text "ANALOG" at 11.836,22.123 h1.3 r90
  text ".3 OFFSET" at 52.123,21.807 h1.52 r90
  text ".2 AMPLI" at 37.414,21.553 h1.52 r90
  text ".4 ADC" at 77.93,14.775 h1.52 r90
  text ".1 SUIVEUR + FILTRE" at 23.52,13.945 h1.52 r90
  text ".0 CARTE MERE, TOP SIDE" at 36.431,4.843 h1.52
Bottom Layer:
  text ".0 CARTE MERE, BOTTOM SIDE" at 68.461,4.843 h1.52

## Silkscreen, mask and mechanical layers (free items; w line width, h text height)
Top Overlay:
  text "12V" at 1.427,90.826 h1 r90
  text "GND" at 1.427,85.683 h1 r90
  text "-12V" at 1.427,80.183 h1 r90
  text "GND" at 1.478,75.65 h1 r90
  text "3V3" at 1.543,70.81 h1 r90
  text "GND" at 1.478,65.638 h1 r90
  text "5V" at 1.543,61.108 h1 r90
  text "GND" at 1.605,55.725 h1 r90
Board:
  the board outline again, w0.254